# Altium PCB PCB1.PcbDoc (part 4 of 4)
Units mil, origin at the board's own origin, x right, y up, seen from the top; angles counter-clockwise.
Board outline 2700 x 1000 mil, 4 copper layers (L1, L2, L3, L4), stack 61.583 mil thick; 64 components, 75 nets, 299 pads, 161 vias.
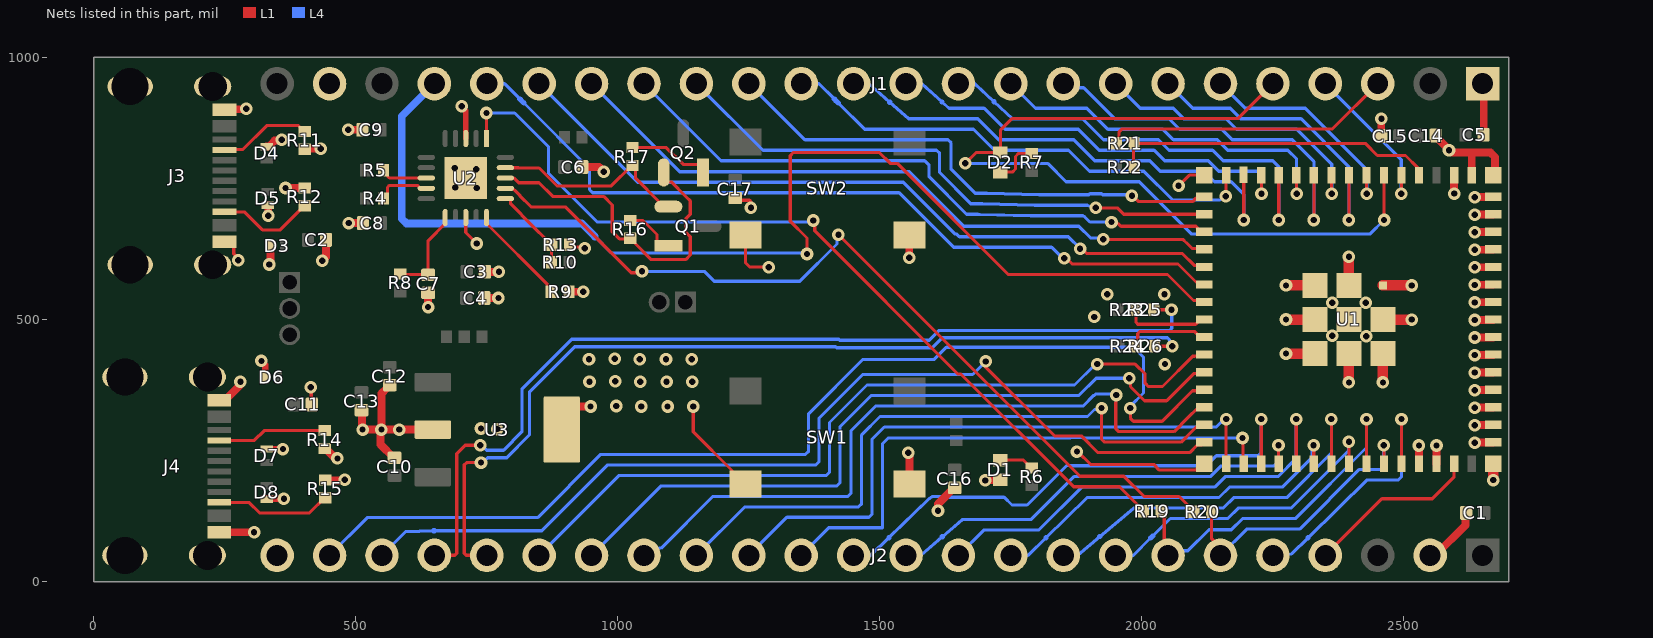
[diagram p4: the nets of this part, all layers, seen from the top]

## Via types
v1: diameter 24, hole 12, L1 to L4, tented both sides, 161 vias

## Nets (pads, with @x,y where several pads share a name; then routed paths per layer and width w, separated by ;. In a path a pad name is that pad's centre, name@x,y a point inside that pad or via, vN(x,y) a via of type N, cw(c..) or ccw(c..) an arc to the next point about the centre after c; other vN are vias at no path point) (continued)
CON_ESP_USB_N: J2.21 R25.1 | length 1825
  L1 w6.23: J2.21@650,50 689.24,50 692.89,53.65 692.89,243.89 708.89,259.89 v1(737.57,259.89) ; R25.1@2022.69,518.51 v1(2056.51,518.51)
  L4 w6.23: v1(737.57,259.89) 740.78,259.89 750.11,250.56 782.11,250.56 817.11,285.56 817.11,367.3 912.16,462.34 1421.47,462.34 1423.58,460.23 1594.11,460.23 1613.11,479.23 2053.53,479.23 2057.18,482.88 2057.18,517.84 v1(2056.51,518.51)
CON_ESP_USB_P: J2.20 R26.1 | length 1758.7
  L1 w6.23: v1(739,227) 711.43,227 707.11,222.68 707.11,53.65 710.76,50 J2.20@750,50 ; R26.1@2024.02,449 v1(2057.85,449)
  L4 w6.23: v1(739,227) 742.21,227 751.53,236.33 788.01,236.33 831.34,279.67 831.34,361.41 918.05,448.11 1415.57,448.11 1417.69,446 1600,446 1619,465 2048.82,465 2052.47,461.35 2052.47,459.18 2057.85,453.81 v1(2057.85,449)
CON_GPIO0: J1.3 R21.1 | length 555.8
  L1 w6: R21.1@1950.99,836 1956.62,841.63 1956.62,857.95 1962.48,863.81 2363.81,863.81 J1.3@2450,950
DTR_FTDI: Q2.2 R16.2 U2.18 | length 643.5
  L1 w6: U2.18@785.41,770 785.64,769.77 802.23,769.77 811,761 849.72,761 875.72,735 973,735 989.49,718.51 989.49,667.51 1003.05,653.95 1022.96,653.95 R16.2@1024,654.99 1025.18,654.99 1030.81,649.36 1030.81,647.17 1063.65,614.34 1129.5,614.34 1138.29,623.12 1138.29,658.07 1129.71,666.66 1129.71,692.18 1138.29,700.76 1138.29,726.28 1130,734.57 1101.84,762.73 1093.38,762.73 1087.6,768.51 Q2.2@1087.6,780.58
ESP_USB_N: R23.2 R25.2 U1.23 | length 160
  L1 w6.03: R23.2@1988.68,518.51 1988.68,494.49 1992.21,490.96 2102.53,490.96 2111.57,500 U1.23@2119.45,500
ESP_USB_P: R24.2 R26.2 U1.24 | length 158.6
  L1 w6.03: R26.2@1991.99,448 1991.99,473.39 1995.52,476.93 2101.18,476.93 2111.57,466.54 U1.24@2119.45,466.54
FTDI_RESET: C7.2 R8.2 U2.11 | length 176.6
  L1 w6: R8.2@585,587.01 585.9,586.11 637.1,586.11 C7.2@638,585.2 638,650.65 670.63,683.28 U2.11@670.63,694.59
FTDI_USB_N: R4.2 U2.9 | length 102.1
  L1 w6.23: R4.2@553.01,731 560.52,738.51 560.52,752.12 564.17,755.77 582,755.77 617.52,755.77 622.98,750.32 U2.9@634.59,750.32
FTDI_USB_P: R5.2 U2.8 | length 90
  L1 w6.23: R5.2@553.01,785 560.52,777.49 560.52,773.65 564.17,770 582,770 U2.8@634.59,770
GND: C1.1 C2.1 C3.1 C4.1 C5.1 C6.1 C7.1 C8.1 C9.1 C10.1 C11.1 C12.2 C13.2 C14.1 C15.2 C16.1 C17.1 D1.1 D3.1 D4.1 D5.1 D6.1 D7.1 D8.1 J1.1 J1.23 J2.2 J2.24 J3.A1B12 J3.B1A12 J3.S1 J3.S2 J3.S3 J3.S4 J4.A1B12 J4.B1A12 J4.S1 J4.S2 J4.S3 J4.S4 R9.2 R11.1 R12.1 R13.1 R14.1 R15.1 SW1.3 SW1.4 SW2.3 SW2.4 U1.1 U1.2 U1.42 U1.43 U1.46 U1.47 U1.48 U1.49 U1.50 U1.51 U1.52 U1.53 U1.54 U1.55 U1.56 U1.57 U1.58 U1.59 U1.60 U1.61 U1.62 U1.63 U1.64 U1.65 U1.66 U1.67 U1.68 U1.69 U1.70 U1.71 U1.72 U1.73 U2.3 U2.13 U2.21 U3.2 U3.4 | length 3718.5
  L1 w6: J3.B1A12@249.68,648.5 260.51,648.5 267.32,641.69 267.32,625.47 276,616.79 v1(276,613) ; v1(414,371) 415.1,369.9 415.1,339.1 C11.1@416.2,338 ; U2.13@710,694.59 710,666 v1(731,645) ; R13.1@908.01,643 912.33,638.68 934.32,638.68 v1(937,636) ; v1(1144,334) 1144,285.92 1217.99,211.93 1217.99,207.01 1238.58,186.42 SW1.3@1243.5,186.42 ; C17.1@1228.31,727.48 1251.52,727.48 v1@1255,724 ; SW2.3@1243.5,661.42 1243.5,608.79 1252.29,600 v1(1288,600) ; v1@1877.5,248 1902,223.5 2022.5,223.5 2033.36,212.64 2102.41,212.64 2105.93,216.16 U1.64@2111.2,216.16 ; v1(2070,755) 2090.59,775.59 U1.63@2119.45,775.59
  L1 w10.01: v1(702,907) 710,899 U2.3@710,845.41
  L1 w12: v1(320,421) 327.2,413.8 D6.1@327.2,390 ; D7.1@330,252.8 v1(361,252.8) ; D8.1@331,157 332,158 v1(363,158)
  L1 w15: J4.B1A12@239.57,94.09 296.91,94.09 v1@297,94 ; J4.A1B12@239.57,346.06 250.39,346.06 280,375.67 v1(280,381) ; J3.A1B12@249.68,900.47 250.45,901.24 290.24,901.24 v1(291,902) ; D8.1@330,157.2 330.8,157.2 D8.1@331,157 ; D4.1@330,829.8 333.7,829.8 345.18,841.28 357.28,841.28 v1(359,843) ; D5.1@332,718.2 332.39,718.2 333,717.59 v1(333,698) ; v1(335,605) 335,607.44 337.2,609.64 D3.1@337.2,641 ; v1(366,751) R12.1@400,751 ; R11.1@400,825.98 v1(433,826) ; R14.1@440,252.99 443.18,252.99 459.45,236.72 463.28,236.72 v1(465,235) ; R15.1@441,193.01 v1@477.99,193.01 ; v1@442,618 443.2,619.2 C2.1@443.2,652 ; v1(485.8,862) C9.1@512.8,862 ; v1(486.8,684) C8.1@513.8,684 ; C13.2@511,326.8 512,325.8 512,291 v1(513,290) v1(549,290) ; C12.2@565,374.8 563.62,374.8 559.31,370.48 559.31,369.11 549,358.8 v1(549,290) ; C10.1@574,236.2 572.62,236.2 547.28,261.55 547.28,288.28 v1(549,290) ; v1(638,523.8) C7.1@638,550.8 ; U3.2@646.97,290 v1(583,290) v1(549,290) ; C4.1@745.2,541 v1(772.2,541) ; C3.1@746.2,591 v1(773.2,591) ; R9.2@907.01,553 v1(934,553) ; U3.4@921,334 v1(947.99,334) ; C6.1@932.2,791 964,791 v1(973,782) ; C17.1@1224,731.8 C17.1@1228.31,727.48 ; v1(1554,246) 1556.5,243.5 SW1.4@1556.5,186.42 ; v1(1556,618) 1556,660.92 SW2.4@1556.5,661.42 ; v1(1611,135) 1611,148.17 1641.62,178.8 C16.1@1643,178.8 ; v1(1701,193) 1701.65,193.65 1729.35,193.65 D1.1@1730,194.3 ; v1(1876,248) v1@1877.5,248 ; U1.64@2111.2,216.16 U1.64@2119.45,224.41 ; C15.2@2456.8,850 2456.8,882.8 v1(2457,883) ; U1.42@2528.9,224.41 v1@2528.9,259.43 ; J2.2@2550,50 2560,50 2617.35,107.35 2617.35,129.56 C1.1@2618.8,131 ; C14.1@2560.2,851 2560.2,849.62 2586,823.83 v1(2586,823) 2588.44,823 2592.96,818.47 2629.29,818.47 ; U1.43@2562.36,224.41 v1@2562.36,259.43 ; v1@2595.83,740.57 U1.2@2595.83,775.59 ; U1.1@2629.29,775.59 2629.29,818.47 ; v1@2635.2,265.11 U1.46@2670.22,265.11 ; v1@2635.2,298.57 U1.47@2670.22,298.57 ; v1@2635.2,332.04 U1.48@2670.22,332.04 ; v1@2635.2,365.5 U1.49@2670.22,365.5 ; v1@2635.2,398.97 U1.50@2670.22,398.97 ; v1@2635.2,432.43 U1.51@2670.22,432.43 ; v1@2635.2,465.9 U1.52@2670.22,465.9 ; v1@2635.2,499.36 U1.53@2670.22,499.36 ; v1@2635.2,532.83 U1.54@2670.22,532.83 ; v1@2635.2,566.29 U1.55@2670.22,566.29 ; v1@2635.2,599.76 U1.56@2670.22,599.76 ; v1@2635.2,633.22 U1.57@2670.22,633.22 ; v1@2635.2,666.68 U1.58@2670.22,666.68 ; v1@2635.2,700.15 U1.59@2670.22,700.15 ; v1@2635.2,733.61 U1.60@2670.22,733.61 ; J1.1@2650,950 2652.2,947.8 C5.1@2652.2,852 ; U1.62@2674,778.96 2674,809.68 2665.21,818.47 2629.29,818.47
  L1 w20: v1(2275,565) v1(2275,565) U1.71@2330.08,564.96 ; v1@2275.04,435.04 U1.73@2330.08,435.04 ; v1(2275,500.04) U1.72@2330.08,500 ; v1(2395,379.96) U1.70@2395.04,435.04 ; U1.69@2395.04,564.96 v1@2395.04,620 ; v1(2459.96,379.96) U1.68@2460,435.04 ; U1.67@2460,500 v1@2515.04,500 ; U1.66@2460,564.96 v1@2515.04,564.96 ; v1(2670.63,193.63) U1.65@2670.63,224.41
  other v1: 306,94 479,194.02 2528.65,259.68 2562.11,259.68 2634.95,264.86 770,291 739,292 2634.95,298.33 2634.95,331.79 1045,334 1095,334 997,335 2634.95,365.26 946,381 1043.01,381 1093.01,381 1142.01,381 995.01,382 2634.95,398.72 2044,415 945,424 1042.01,424 1092.01,424 1141.01,424 994.01,425 2634.95,432.19 2275,435.08 2634.95,465.65 2428,468 2363,469 2634.95,499.11 2515.08,499.96 1909,505 2363,532 2427,532 2634.95,532.58 1934,548 2043,548 2515.08,564.92 2634.95,566.04 2634.95,599.51 436,612 2395.08,620.04 2634.95,632.97 2634.95,666.44 2634.95,699.9 1254,713 2634.95,733.37 2596.07,740.32 731,751 690,752 730,787 689,789
GPIO0: R21.2 R22.2 U1.4 | length 619.4
  L1 w6: R22.2@1983,793 1984,794 1984,835 R21.2@1985.01,836 2426.31,836 2449.39,812.92 2502.94,812.92 2526.02,789.84 2526.02,778.46 U1.4@2528.9,775.59
GPIO1: J1.4 U1.5 | length 305.8
  L1 w6: v1(2495,740) 2495.43,740.43 U1.5@2495.43,775.59
  L4 w6: J1.4@2350,950 2495,805 v1(2495,740)
GPIO2: D2.1 J1.5 U1.6 | length 1626.5
  L1 w6: v1(1663,798) 1683.7,818.7 D2.1@1730,818.7 1730,861 1752.81,883.81 2183.81,883.81 J1.5@2250,950 ; v1(2462.04,689.96) U1.6@2461.97,775.59
  L4 w6: v1(1663,798) 1820.18,798 1855.18,763 1995,763 2095.04,662.96 2435.04,662.96 v1(2462.04,689.96)
GPIO3: J1.6 U1.7 | length 428.8
  L1 w6: U1.7@2428.43,775.59 2428.75,775.27 2428.75,740.25 v1(2429,740)
  L4 w6: J1.6@2150,950 2197,903 2312,903 2429,786 v1(2429,740)
GPIO4: J1.7 U1.8 | length 598
  L1 w6: v1(2395.04,689.96) U1.8@2395.04,775.59
  L4 w6: J1.7@2050,950 2097,903 2168.72,903 2188.72,883 2303.72,883 2395.04,791.68 v1(2395.04,689.96)
GPIO5: J1.8 U1.9 | length 567.1
  L1 w6: v1@2361.89,740.25 U1.9@2361.89,775.27
  L4 w6: J1.8@1950,950 1997,903 2060,903 2080,883 2160.43,883 2180.43,863 2295.43,863 2362.14,796.29 v1(2362.14,740)
GPIO6: J1.9 U1.10 | length 737
  L1 w6: v1(2328.18,689.96) U1.10@2328.18,775.59
  L4 w6: J1.9@1850,950 1857.73,942.27 1888.73,942.27 1948,883 2051.72,883 2071.72,863 2152.15,863 2172.15,843 2286.9,843 2328.18,801.72 v1(2328.18,689.96)
GPIO7: J1.10 U1.11 | length 706.1
  L1 w6: v1@2294.96,740.25 U1.11@2294.96,775.27
  L4 w6: J1.10@1750,950 1797,903 1895,903 1935,863 2040,863 2060,843 2143.86,843 2163.86,823 2278.61,823 2295.21,806.4 v1(2295.21,740)
GPIO8: J1.11 U1.12 | length 862.9
  L1 w6: v1(2261.25,689.96) U1.12@2261.25,775.59
  L4 w6: J1.11@1650,950 1681.22,950 1717.88,915.69 ; 1717.98,915.6 1753,883 1757.14,883 1886.72,883 1926.72,843 2031.72,843 2051.72,823 2135,823 2155,803 2250,803 2261.25,791.75 v1(2261.25,689.96)
  L4 w10: 1717.88,915.69 ccw(c1750,950) 1717.98,915.6
GPIO9: J1.12 U1.13 | length 820.7
  L1 w6: v1@2228.04,740.25 U1.13@2228.04,775.27
  L4 w6: J1.12@1550,950 1579.95,950 1618.46,915.15 ; 1618.6,915.02 1632,903 1636.14,903 1699,903 1739,863 1878.43,863 1918.43,823 2023.43,823 2043.43,803 2126.72,803 2146.72,783 2222.43,783 2228.28,777.14 v1(2228.28,740)
  L4 w10: 1618.46,915.15 ccw(c1650,950) 1618.6,915.02
GPIO10: J1.13 U1.14 | length 963.9
  L1 w6: v1(2194.32,689.96) U1.14@2194.32,775.59
  L4 w6: J1.13@1450,950 1479.22,950 1518.79,914.86 ; 1518.95,914.71 1555,883 1559.14,883 1687,883 1727,843 1870.15,843 1910.15,803 2015.15,803 2035.15,783 2118.43,783 2138.43,763 2170.18,763 2194.32,738.86 v1(2194.32,689.96)
  L4 w10: 1518.79,914.86 ccw(c1550,950) 1518.95,914.71
GPIO11: J1.14 U1.15 | length 945.8
  L1 w6: v1(2160,735) 2160.39,735.39 2160.39,775.2 U1.15@2160.79,775.59
  L4 w6: J1.14@1350,950 1384,950 1413.06,920.94 ; 1420.94,913.06 1471,863 1475.14,863 1678.72,863 1718.72,823 1860,823 1900,783 2003.82,783 2058.82,728 2149.21,728 2156.21,735 v1(2160,735)
  L4 w10: 1413.06,920.94 ccw(c1450,950) 1420.94,913.06
GPIO12: J1.15 U1.16 | length 996.4
  L1 w6: v1(1981,736) 1982.86,736 1993.86,725 2096.72,725 2103.09,731.38 2116.57,731.38 U1.16@2119.45,734.25
  L4 w6: J1.15@1250,950 1357,843 1630.14,843 1636,837.14 1636,786.82 1678.89,743.93 1681.82,741 1703.96,741 1803.89,738 1898.82,738 1900.82,740 1923.18,740 1925.18,738 1979,738 v1(1981,736)
GPIO13: J1.16 U1.17 | length 1091.6
  L1 w6: v1(1912,713) 1953.18,713 1965.4,700.79 U1.17@2119.45,700.79
  L4 w6: J1.16@1150,950 1277,823 1608.14,823 1614,817.14 1614,780.53 1673.53,721 1695.67,721 1795.53,718 1896.1,718 v1(1912,713)
GPIO14: J1.17 U1.18 | length 1199.4
  L1 w6: v1(1942,686) 1944.68,683.32 1954.58,683.32 1956.04,681.86 1959.99,677.91 2102.84,677.91 2108.7,672.06 2108.7,670.2 2111.57,667.32 U1.18@2119.45,667.32
  L4 w6: J1.17@1050,950 1197,803 1585.39,803 1594,794.39 1594,772.25 1665.25,701 1687.39,701 1687.95,700.44 1690.63,700.38 1787.25,698 1887.82,698 1891.28,695.54 1900.82,686 v1(1942,686)
GPIO15: J1.18 U1.19 | length 1300.4
  L1 w6: v1(1926,653) 2078,653 2085,646 2085.58,646 2096.17,635.41 2117.9,635.41 U1.19@2119.45,633.86
  L4 w6: J1.18@950,950 1118,782 1555.96,782 1659.96,678 1879.53,678 1901.85,655.68 1923.32,655.68 v1(1926,653)
GPIO16: J1.19 U1.20 | length 1414.7
  L1 w6: v1(1882,635) 1885.79,635 1894.79,626 2077.29,626 2100.02,603.27 2116.57,603.27 U1.20@2119.45,600.39
  L4 w6: J1.19@850,950 1038,762 1545,762 1644,663 1646.68,663 1651.68,658 1859.75,658 1882,635.75 v1(1882,635)
GPIO17: J1.20 U1.21 | length 1551.7
  L1 w6: v1(1852,617) 1855.79,617 1866.79,606 2069.01,606 2105.2,569.8 2116.57,569.8 U1.21@2119.45,566.93
  L4 w6: J1.20@750,950 784,950 813.06,920.94 ; 820.94,913.06 946,788 946,747.86 951.86,742 1536.72,742 1640.72,638 1827.75,638 1848.75,617 v1(1852,617)
  L4 w10: 813.06,920.94 ccw(c850,950) 820.94,913.06
GPIO18: J1.21 U1.22 | length 2196.4
  L1 w6: v1(1361,625) 1361,655.53 1329,687.53 1329,812.72 1334.86,818.58 1499.18,818.58 1519.77,797.99 1533.01,797.99 1745,586 2048.86,586 2098.52,536.34 2116.57,536.34 U1.22@2119.45,533.46
  L4 w6: 956.04,658.68 987.72,627 1359,627 v1(1361,625)
  L4 w15: J1.21@650,950 587.87,887.87 587.87,692.29 596.66,683.5 931.22,683.5 956.04,658.68
GPIO21: J2.19 U1.25 | length 1529.8
  L1 w6: v1(1915,415) 1987.18,415 2006.21,395.97 2006.21,378.07 2012.07,372.21 2039.4,372.21 2097.06,429.87 2100.43,429.87 2100.75,430.2 2116.57,430.2 U1.25@2119.45,433.07
  L4 w6: J2.19@850,50 1002.6,202.6 1398.14,202.6 1404,208.45 1404,303.56 1475.44,375 1871.43,375 1911.43,415 v1(1915,415)
GPIO26: J2.18 U1.26 | length 1416.4
  L1 w6: v1(1976,388) 1978.16,385.84 1978.16,371.98 2005,345.14 2047.14,345.14 2098.73,396.73 U1.26@2116.57,396.73
  L4 w6: J2.18@950,50 1082.6,182.6 1418.14,182.6 1424,188.45 1424,295.28 1483.72,355 1879.71,355 1912.71,388 v1(1976,388)
GPIO33: J2.17 U1.28 | length 1341
  L1 w6: 1950,342.18 1950,291.86 1955.86,286 2061.4,286 2088.7,313.3 2105.2,329.8 2116.57,329.8 U1.28@2119.45,332.68
  L4 w6: J2.17@1050,50 1064.61,50 1078.35,63.73 1082.73,63.73 1181.6,162.6 1439.14,162.6 1445,168.45 1445,287.99 1492.01,335 1887.99,335 1908.32,355.32 1909.14,355.32 1911.82,358 1949,358 v1(1951,356)
GPIO34: J2.16 U1.29 | length 1238.1
  L1 w6: v1(1923,331) 1923,271.86 1928.86,266 2074.87,266 2097.49,288.62 2105.2,296.34 2116.57,296.34 U1.29@2119.45,299.21
  L4 w6: J2.16@1150,50 1242.6,142.6 1459.28,142.6 1465.14,148.45 1465.14,279.85 1500.29,315 1896.28,315 1909.6,328.32 1920.32,328.32 v1(1923,331)
GPIO35: J2.15 U1.31 | length 1187.9
  L1 w6: U1.31@2160.72,224.41 v1(2160.72,310.04)
  L4 w6: J2.15@1250,50 1322.6,122.6 1479.28,122.6 1485.14,128.45 1485.14,271.57 1508.57,295 2141.89,295 2156.93,310.04 v1(2160.72,310.04)
GPIO36: J2.14 U1.32 | length 1079.8
  L1 w6: v1(2192,274) 2193.13,272.87 2193.13,225.54 U1.32@2193.93,224.73
  L4 w6: J2.14@1350,50 1402.6,102.6 1505.14,102.6 1505.14,263.28 1515.86,274 1863.82,274 1864.82,275 1887.18,275 1888.18,274 v1(2192,274)
GPIO37: J2.13 U1.33 | length 1020.6
  L1 w6: U1.33@2227.65,224.41 v1(2227.65,310.04)
  L4 w6: J2.13@1450,50 1482.57,50 1517.24,83.7 ; 1517.28,83.74 1594.4,158.51 1599.82,162 1622.18,162 1623.18,161 1737.17,161 1752.17,146 1781,146 1856.27,221.27 1864.55,221.27 1864.82,221 2123.01,221 2142.18,240.17 2221.79,240.17 2227.65,246.03 v1(2227.65,310.04)
  L4 w10: 1517.24,83.7 cw(c1550,50) 1517.28,83.74
GPIO38: J2.12 U1.34 | length 847.7
  L1 w6: U1.34@2260.86,224.73 v1@2260.86,259.75
  L4 w6: J2.12@1550,50 1578.37,50 1619.16,85.47 ; 1619.39,85.66 1657.17,118.17 1788,118.17 1870.12,200.28 2130.58,200.28 2150.47,220.17 2251.41,220.17 2260.61,229.38 v1(2260.61,260)
  L4 w10: 1619.16,85.47 cw(c1650,50) 1619.39,85.66
GPIO39: J2.11 U1.35 | length 881.8
  L1 w6: U1.35@2294.65,224.41 v1(2294.57,310.04)
  L4 w6: J2.11@1650,50 1698.17,98.17 1802.83,98.17 1884.95,180.28 2138.86,180.28 2158.75,200.17 2259.69,200.17 2294.57,235.06 v1(2294.57,310.04)
GPIO40: J2.10 U1.36 | length 710.8
  L1 w6: U1.36@2327.79,224.73 v1@2327.79,259.75
  L4 w6: J2.10@1750,50 1782.95,50 1817.05,83.52 ; 1817.13,83.59 1895.28,160.28 2147.15,160.28 2167.04,180.17 2267.98,180.17 2324.86,237.06 2324.86,257.32 v1(2327.54,260)
  L4 w10: 1817.05,83.52 cw(c1850,50) 1817.13,83.59
GPIO41: J2.9 U1.37 | length 738.4
  L1 w6: U1.37@2361.5,224.41 v1(2361.5,310.04)
  L4 w6: J2.9@1850,50 1877.5,50 1919.53,85.78 ; 1919.74,85.96 1984.28,140.28 2155.43,140.28 2175.32,160.17 2276.26,160.17 2361.5,245.42 v1(2361.5,310.04)
  L4 w10: 1919.53,85.78 cw(c1950,50) 1919.74,85.96
GPIO42: J2.8 U1.38 | length 586.5
  L1 w6: U1.38@2395.02,225.03 v1(2395,267)
  L4 w6: J2.8@1950,50 1984,50 2016.53,83 ; 2020.94,86.94 2054.28,120.28 2163.72,120.28 2183.6,140.17 2284.54,140.17 2394.19,249.81 2394.19,266.19 v1(2395,267)
  L4 w10: 2016.53,83 cw(c2050,50) 2020.94,86.94
GPIO45: J2.5 U1.41 | length 501.3
  L1 w6: U1.41@2495.43,224.41 v1(2495.36,310.04)
  L4 w6: J2.5@2250,50 2285.77,52.86 2317.1,83.57 ; 2317.13,83.6 2430,194 2489.5,194 2495.36,199.86 v1(2495.36,310.04)
GPIO46: J2.4 U1.44 | length 332.5
  L1 w6: J2.4@2350,50 2458,158 2554,158 2595.7,199.7 2595.7,224.28 U1.44@2595.83,224.41
GPIO47: J2.23 U1.27 | length 2062.6
  L1 w6: v1(1978,331) 1978,311.86 1983.86,306 2038.5,306 2096.5,364 2117.31,364 U1.27@2119.45,366.14
  L4 w6: J2.23@450,50 522,122 847,122 967.6,242.6 1358.14,242.6 1364,248.45 1364,320.13 1467.87,424 1604,424 1627,447 1984,447 2003,428 2003,359.79 1978,334.79 v1(1978,331)
GPIO48: J2.22 U1.30 | length 1852.7
  L1 w6: v1@1697.64,413.64 1833.28,278 1884.18,278 1916.18,246 2091.16,246 2106.03,260.87 2114.57,260.87 U1.30@2119.45,265.75
  L4 w6: J2.22@550,50 592.07,92.07 595,95 648.26,96.97 ; 650,97 855,97 857.92,99.92 980.6,222.6 1378.14,222.6 1384,228.45 1384,311.85 1467.15,395 1677,395 v1(1702,420)
  L4 w10: 648.26,96.97 cw(c650,50) 650,97
NetD1_2: D1.2 R6.1 | length 66.1
  L1 w6: D1.2@1730,231.7 1774.13,231.7 1788.82,217.01 R6.1@1790,217.01
NetD2_2: D2.2 R7.1 | length 88.8
  L1 w6: D2.2@1730,781.3 1752.92,781.3 1758.78,787.16 1758.78,811.15 1764.64,817.01 R7.1@1790,817.01
NetJ3_A5: J3.A5 R11.2 | length 177
  L1 w6: J3.A5@249.68,823.7 250.59,824.61 284.9,824.61 330.29,870 390.83,870 401.82,859.01 R11.2@403,859.01
NetJ3_B5: J3.B5 R12.2 | length 186.7
  L1 w6: J3.B5@249.68,705.59 249.78,705.49 287.32,705.49 321.82,671 355.83,671 401.82,716.99 R12.2@403,716.99
NetJ4_A5: J4.A5 R14.2 | length 209.2
  L1 w6: J4.A5@239.57,269.29 306.58,269.29 325.3,288.01 R14.2@441,288.01
NetJ4_B5: J4.B5 R15.2 | length 222.8
  L1 w6: J4.B5@239.57,151.18 290,151.18 296.11,151.18 316.29,131 411.83,131 440.82,159.99 R15.2@442,159.99
NetQ1_1: Q1.1 R16.1 | length 101.7
  L1 w6: R16.1@1024,689.01 1048.17,689.01 1074.86,662.31 1074.86,646.86 1081.12,640.6 Q1.1@1096.58,640.6
NetQ2_1: Q2.1 R17.1 | length 159.4
  L1 w6: R17.1@1028,828 1092.77,828 1124.74,796.03 1156.14,796.03 1162.4,789.77 Q2.1@1162.4,780.58
NetR9_1: R9.1 U2.15 | length 192.8
  L1 w6: U2.15@749.37,694.59 749.37,683.28 867.36,565.29 867.36,558.63 R9.1@872.99,553
NetR19_1: 
NetR20_1: 
RTS_FTDI: Q1.2 R17.2 U2.19 | length 388.6
  L1 w6: U2.19@785.41,789.68 785.64,789.46 810.72,789.46 811,789.18 849.82,789.18 884,755 987.83,755 1026.82,793.98 R17.2@1029.18,793.98 ; R17.2@1028,793.98 1028.37,793.98 1034,788.35 1034,769.27 1078.73,724.54 1078.73,721.19 1084.51,715.4 Q1.2@1096.58,715.4
RXD_FTDI: R19.2 U2.1 | length 1659.9
  L1 w6: U2.1@749.37,845.41 v1(749.37,894) ; v1(1373,689) 1375.68,686.32 1375.68,669.14 1649,395.81 1654.85,395.81 1869.66,181 1957.17,181 2002.99,135.18 R19.2@2002.99,134
  L4 w6: v1(749.37,894) 803.18,894 867.93,829.25 867.93,778.61 960.54,686 1360.14,686 1360.46,686.32 1370.32,686.32 v1(1373,689)
TXD_FTDI: R20.2 U2.17 | length 1655.2
  L1 w6: U2.17@785.41,750.32 799.06,750.32 802.97,746.4 803.7,746.4 811,739.11 812.94,737.16 812.94,736.43 834.37,715 899.66,715 1025.33,589.33 1043.51,589.33 v1(1046.12,591.94) ; v1(1421,662) 1882,201 1965.46,201 2004.23,162.23 2070.94,162.23 2098.99,134.18 R20.2@2098.99,133
  L4 w6: v1(1046.12,591.94) 1165.08,591.94 1184.01,573 1347.18,573 1418.32,644.14 1418.32,659.32 v1(1421,662)
U0RXD: J2.6 R20.1 U1.40 | length 547
  L1 w6: R20.1@2133.01,133 2133.01,81.6 2150,64.61 J2.6@2150,50 ; U1.40@2461.65,224.73 v1@2461.65,259.75
  L4 w6: J2.6@2150,50 2200,100 2300.94,100 2414.94,214 2455.54,214 2461.4,219.86 v1(2461.4,260)
U0TXD: J2.7 R19.1 U1.39 | length 693
  L1 w6: R19.1@2037.01,134 2042.64,128.37 2042.64,57.36 J2.7@2050,50 ; U1.39@2428.5,224.41 v1(2428.5,310.04)
  L4 w6: J2.7@2050,50 2058.73,58.73 2087.73,58.73 2128,99 2170.72,99 2191.89,120.17 2292.83,120.17 2428.5,255.85 v1(2428.5,310.04)
VBUS_SENSE: R10.1 R13.2 U2.16 | length 165.3
  L1 w6: U2.16@785.41,730.63 795.21,730.63 795.43,730.4 795.43,720.61 837.04,679 866.23,649.81 868.36,649.81 873.04,645.13 R13.2@873.04,643 ; R10.1@872.99,609 873.49,609.5 873.49,642.5 R13.2@873.99,643
pads on no net: J1.24 J3.A8 J3.B8 J4.A8 J4.B8 U2.2 U2.4 U2.5 U2.6 U2.7 U2.14

## Polygon pours and split planes (outlines as drawn)
GND on L1 "GND_L01_P009" (solid, pour order 9): 949,455 1192,453 1193,452 1193,311.62 1192,157 902,157 758,277 688,277 676,265 517,265 486,296 487,297 487,344 531.69,344 533,342.69 537.31,347 600,347 632,315 815,315 829,329 827,329 951,453 951,455 952,455
GND on L1 "GND_L01_P008" (solid, pour order 8): 2232,646 2549,646 2550,647 2551,646 2551,361 2235,361 2232,364 2232,648
+5V_VBUS2 on L1 "+5V_VBUS2_L01_P007" (solid, pour order 7): 402,482 387,497 359,497 344,482 346,480 346,405 343,402 343,320 394,320 403,329
+5V on L1 "+5V_L01_P004" (solid, pour order 4): 353,545 381,545 477,449 477,290 548.34,218.66 683,218.66 683,180 567,180 463,284 463,421 387,497 353,497
+5V_VBUS1 on L1 "+5V_VBUS1_L01_P005" (solid, pour order 5): 351.28,660 387.88,660 392.18,664.31 392.18,666 421.18,666 421.18,640.31 417.18,636.31 397,636.31 397,547.06 352.18,547.06 352.18,657.31
+3V3_REG on L1 "+3V3_REG_L01_P003" (solid, pour order 3): 494,374 494,350 493,349 495,347 528,347 528,370 553,395 601,395 601,393 609,385 609,362 688,362 692.5,366.5 695,364 695,337 697,335 812,335 812,360 803,369 722,369 686,405 618,405 600,423 543,423 495,375 495,377
+3V3_FTDI on L1 "+3V3_FTDI_L01_P002" (solid, pour order 2): 596.02,539.41 547.59,539.41 536,551 536,698 586,698 614,726 614,739 658,739 661,736 661,714 631,714 594,677 561,677 561,573 568,566 600,566 600,543 602,541 600,539 597,539
+3V3_FTDI on L1 "+3V3_FTDI_L01_P001" (solid, pour order 1): 909,862 911,860 911,778 882,778 856,804 813,804 813,841 834,862 910,862
+3V3 on L1 "+3V3_L01_P000" (solid, pour order 0): 2478.19,893.72 2478.81,893.1 2478.81,835.19 2479.81,834.19 2481.81,836.19 2539.81,836.19 2539.81,875.19 2541.14,885.01 2534,896 2478.81,897.19 2478.81,893.19
GND on L2 "GND_L02_P012" (solid, pour order 12): 7.04,15.93 2690.43,15.93 2690.5,16 2687,19.5 2687,990 9.05,990 7,992.05 7,21
+3V3_REG on L2 "+3V3_REG_L02_P011" (solid, pour order 11): 588.14,455.88 594.1,320.8 862,316 862,428.38
+3V3 on L2 "+3V3_L02_P010" (solid, pour order 10): 2693,15 2687,21 2687,990 901,990 896,985 898,983 898,894 928,894 988,834 988,547 1050,485 1051,486 1107,486 1104,489 1104,548 1179,623 1288,623 1754,157 1783,157 1783,706 1815,738 1958,738 2029,809 2034,804 2474,804 2474,799 2577,696 2577,51 2613,15 2615,17 2688,17
GND on L3 (split plane): 2699.95,0.05 0.05,0.05 0.05,999.95 2699.95,999.95

## Silkscreen, mask and mechanical layers (free items; w line width, h text height)
Top Overlay:
  text "J1" at 2311,837 h40
  text "USER LED" at 1686,712 h20
  text "BOOT/USER" at 1306,560 h30
  text "USB1" at 442,544 h20
  text "UART" at 18,523 h40
  text "REG" at 1199,496 h20
  text "+5V" at 436,495 h20
  text "3V3" at 949,493 h20
  text "USB2" at 440,455 h20
  text "ESP" at 29,430 h40
  text "RESET" at 1356,413 h30
  text "POWER LED" at 1696,289 h20
  text "J2" at 2295,120 h40
Bottom Overlay:
  text "+3V3" at 2473,874 h20 r90
  text "I00" at 2379,872 h20 r90
  text "GND" at 2574,871 h20 r90
  text "I017" at 677,869 h20 r90
  text "I016" at 785,869 h20 r90
  text "I015" at 884,868 h20 r90
  text "I014" at 984,868 h20 r90
  text "I018" at 577,867 h20 r90
  text "I013" at 1082,867 h20 r90
  text "I03" at 2072,867 h20 r90
  text "I02" at 2175,867 h20 r90
  text "I01" at 2270,867 h20 r90
  text "NC" at 365,866 h20 r90
  text "GND" at 471,866 h20 r90
  text "I012" at 1184,866 h20 r90
  text "I011" at 1283,866 h20 r90
  text "I07" at 1678,865 h20 r90
  text "I05" at 1879,865 h20 r90
  text "I04" at 1976,865 h20 r90
  text "I010" at 1386,864 h20 r90
  text "I09" at 1478,864 h20 r90
  text "I08" at 1577,864 h20 r90
  text "I06" at 1779,864 h20 r90
  text "GND" at 2684,810 h30 r90
  text "[---PIN1---]" at 2677,575 h20 r90
  text "SIDDHARTH'2026" at 1683,486 h30
  text "+3V3" at 2654,199 h20 r90
  text "IO46" at 2359,194 h20 r90
  text "IO45" at 2250,189 h20 r90
  text "TXD" at 2054,188 h20 r90
  text "GND" at 2561,188 h20 r90
  text "IO42" at 1960,186 h20 r90
  text "RXD" at 2155,185 h20 r90
  text "I039" at 1656,184 h20 r90
  text "I038" at 1562,182 h20 r90
  text "IO40" at 1757,181 h20 r90
  text "IO41" at 1851,181 h20 r90
  text "I037" at 1461,178 h20 r90
  text "I021" at 862,176 h20 r90
  text "I036" at 1361,176 h20 r90
  text "I034" at 1163,175 h20 r90
  text "USB+" at 768,174 h20 r90
  text "I035" at 1262,174 h20 r90
  text "I026" at 963,173 h20 r90
  text "I033" at 1065,173 h20 r90
  text "EN" at 2459,173 h20 r90
  text "I047" at 460,170 h20 r90
  text "USB-" at 659,169 h20 r90
  text "IO48" at 561,167 h20 r90
  text "GND" at 360,162 h20 r90
Board Shape:
  lines w20: 2,4 2697,4 2697,999 2696,1000 2,1000 2,4

## Text inside footprints (layer, text, board x,y; h text height)
FTS-103-01-F-S: Top Overlay "1" at 300,552 h40
J1: Bottom Overlay "1" at 2673,890 h40 r180
J2: Bottom Overlay "1" at 2679,106 h40
J5: Top Overlay "1" at 1110,459 h40 r270